# Altium PCB Boost_Conv_V1.0PCB.PcbDoc (part 2 of 3)
Units mm, origin at the board's own origin, x right, y up, seen from the top; angles counter-clockwise.
Board outline 213.5 x 150 mm, 2 copper layers (Top Layer, Bottom Layer); 53 components, 42 nets, 190 pads, 3434 vias.
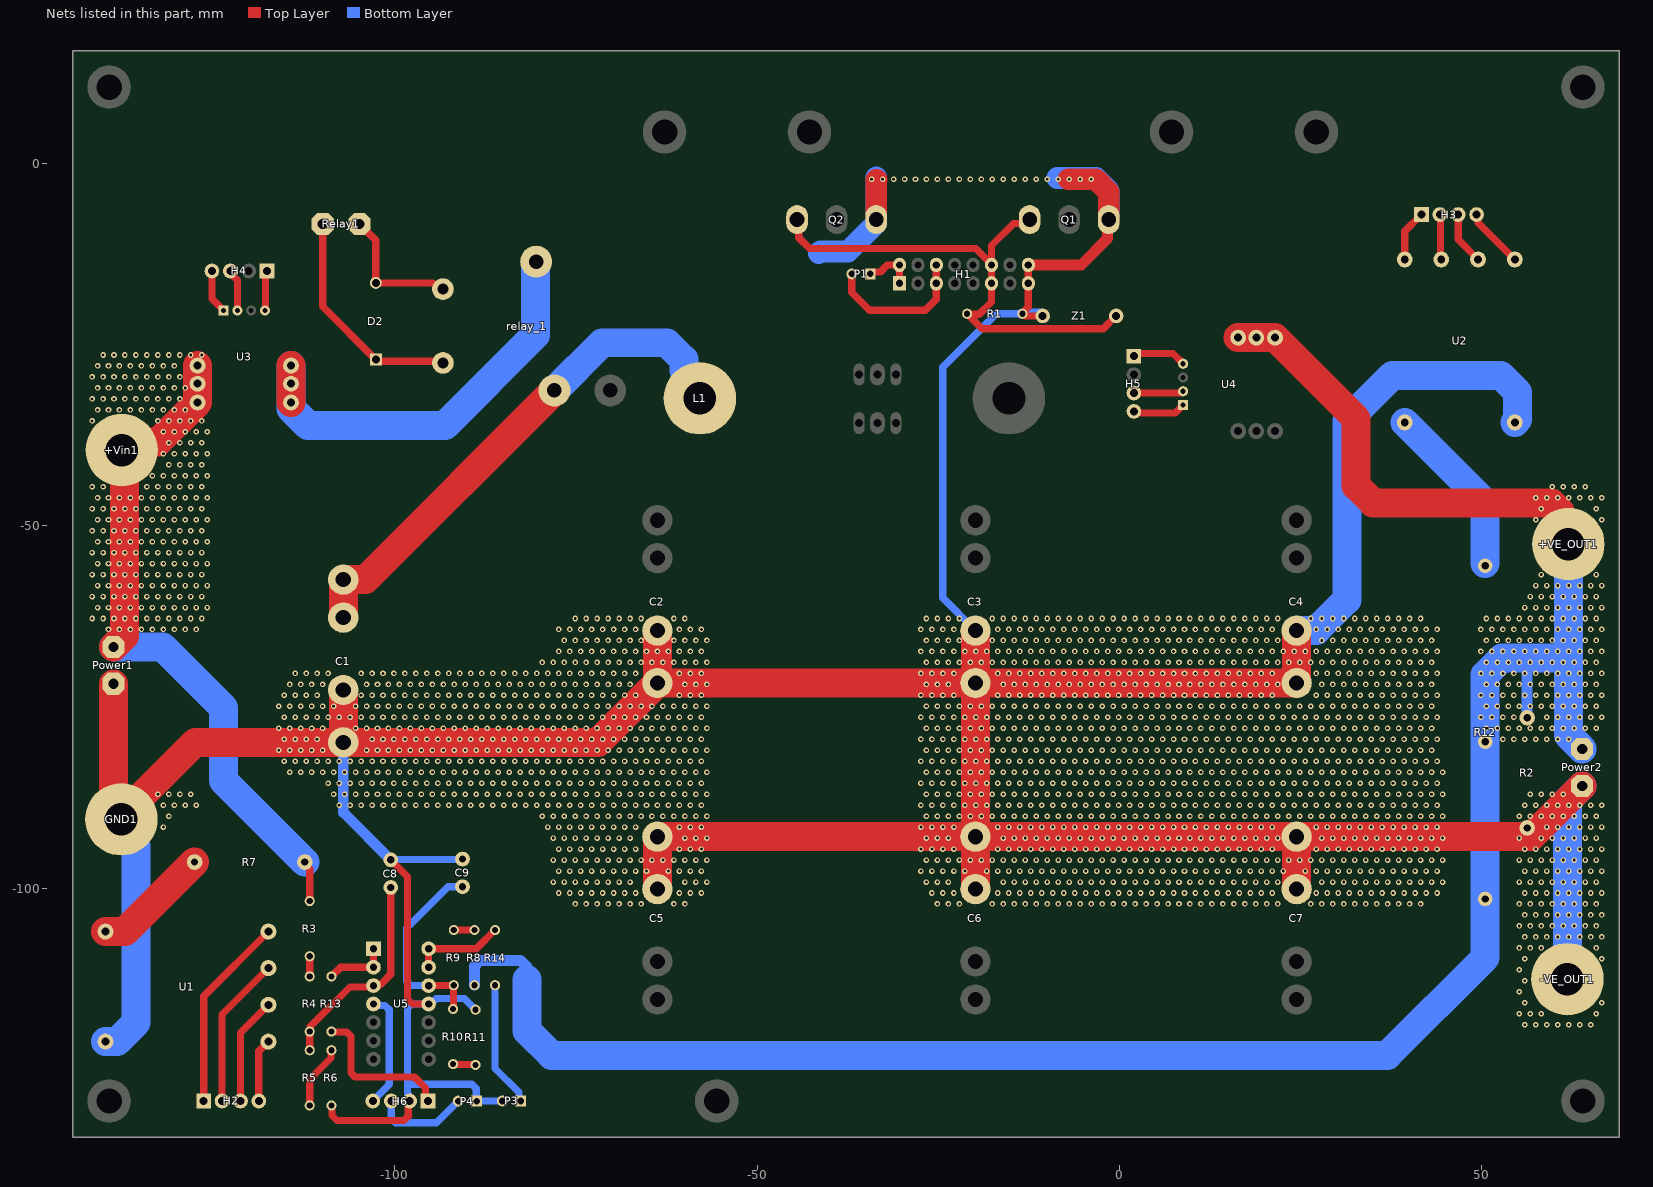
[diagram p2: the nets of this part, all layers, seen from the top]

## Via types
v1: diameter 0.762, hole 0.381, Top Layer to Bottom Layer, 3433 vias
v2: diameter 2, hole 1, Top Layer to Bottom Layer, 1 vias

## Nets (pads, with @x,y where several pads share a name; then routed paths per layer and width w, separated by ;. In a path a pad name is that pad's centre, name@x,y a point inside that pad or via, vN(x,y) a via of type N, cw(c..) or ccw(c..) an arc to the next point about the centre after c; other vN are vias at no path point) (continued)
Emitter: -VE_OUT1.1 C1.2 C2.2 C3.2 C4.2 C5.2 C6.2 C7.2 C8.2 C9.2 GND1.1 H1.8 H6.2 P3.2 P4.1 Power1.1 Power2.2 Q1.3 Q2.3 R1.1 R2.1 R6.1 R11.1 U1.- U2.- U5.11 Z1.A | length 750
  Top Layer w1: R6.1@-108.774,-130.013 -108.697,-130.09 -108.697,-131.418 -108.011,-132.103 -98.774,-132.103 -98.171,-131.501 -98.171,-129.601 H6.2@-97.974,-129.403 ; C8.2@-100.574,-96.103 -100.574,-96.122 -98.274,-98.422 -98.274,-115.318 -97.588,-116.003 U5.11@-95.354,-116.003 ; H1.8@-12.554,-13.963 H1.8@-12.554,-16.503 -12.554,-19.775 -13.374,-20.595 R1.1@-13.374,-20.703 -13.265,-20.703 -12.965,-21.003 Z1.A@-10.574,-21.003
  Top Layer w1.5: H1.8@-12.554,-13.963 -5.25,-13.963 -1.618,-10.331 -1.618,-7.868 Q1.3@-1.448,-7.698
  Top Layer w3: Q2.3@-33.553,-7.698 -33.553,-2.235 -33.528,-2.21 ; v1@-7.01,-2.135 -3.205,-2.135 -1.448,-3.893 Q1.3@-1.448,-7.698
  Top Layer w4: Power1.1@-138.886,-71.792 -138.886,-89.391 GND1.1@-137.774,-90.503 ; GND1.1@-137.774,-90.103 -127.558,-79.887 C1.2@-107.136,-79.887 ; C1.2@-107.136,-72.648 C1.2@-107.136,-79.887 ; C5.2@-63.766,-100.14 C5.2@-63.766,-92.901 C6.2@-19.849,-92.901 ; C2.2@-63.766,-64.444 C2.2@-63.766,-71.683 ; C6.2@-19.849,-100.14 C6.2@-19.849,-92.901 ; C3.2@-19.849,-64.444 C3.2@-19.849,-71.683 ; C7.2@24.499,-100.14 C7.2@24.499,-92.901 ; C4.2@24.499,-64.444 C4.2@24.499,-71.683 C3.2@-19.849,-71.683 ; Power2.2@63.926,-85.883 56.908,-92.901 C7.2@24.499,-92.901 ; C1.2@-107.136,-79.887 -71.97,-79.887 C2.2@-63.766,-71.683 ; C2.2@-63.766,-71.683 C3.2@-19.849,-71.683 ; C6.2@-19.849,-92.901 C7.2@24.499,-92.901 ; C6.2@-19.849,-92.901 C3.2@-19.849,-71.683
  Bottom Layer w1: C8.2@-100.574,-96.103 -100.519,-96.048 -90.729,-96.048 C9.2@-90.674,-95.993 ; H6.2@-97.974,-129.403 -98.171,-129.206 -98.171,-128.476 -98.274,-128.374 -98.274,-127.103 ; R11.1@-88.874,-116.793 -88.877,-116.793 -90.431,-115.239 -94.31,-115.239 -95.074,-116.003 U5.11@-95.354,-116.003 -97.688,-116.003 -98.274,-116.589 -98.274,-127.103 ; P3.2@-85.174,-129.4 -85.176,-129.402 -88.732,-129.402 P4.1@-88.734,-129.403 -88.774,-129.363 -88.774,-127.703 -89.374,-127.103 -98.274,-127.103 ; C3.2@-19.849,-64.444 -24.374,-59.92 -24.374,-28.103 -16.974,-20.703 R1.1@-13.374,-20.703 ; Z1.A@-10.874,-20.703 cw(c-10.874,-21.003) -10.853,-20.704 cw(c-10.874,-21.003) -10.574,-20.983 cw(c-10.874,-21.003) Z1.A@-10.574,-21.003 ; 62.527,-86.813 63.457,-85.883 Power2.2@63.926,-85.883
  Bottom Layer w1.5: C1.2@-107.136,-79.887 -107.136,-89.541 C8.2@-100.574,-96.103 ; R1.1@-13.374,-20.703 -10.874,-20.703 Z1.A@-10.854,-20.703 ; Z1.A@-10.853,-20.704 -10.574,-20.983 Z1.A@-10.387,-21.17
  Bottom Layer w3: -41.478,-12.319 -41.25,-12.09 -37.446,-12.09 -33.553,-8.198 Q2.3@-33.553,-7.698 -33.553,-1.849 ; v1@-8.56,-1.96 -3.205,-1.96 -1.448,-3.717 Q1.3@-1.448,-7.698
  Bottom Layer w4: U1.-@-139.974,-121.203 -138.374,-121.203 -135.731,-118.56 -135.731,-94.17 -137.774,-92.127 GND1.1@-137.774,-90.503 ; C4.2@24.499,-64.444 24.537,-64.406 27.224,-64.406 31.426,-60.203 31.426,-35.503 37.726,-29.203 52.683,-29.203 55.026,-31.547 55.026,-35.303 U2.-@54.626,-35.703 ; -VE_OUT1.1@61.885,-112.578 61.885,-87.924 Power2.2@63.926,-85.883
  other v1: 56.01,-118.871 57.526,-118.871 59.042,-118.871 60.558,-118.871 62.074,-118.871 63.59,-118.871 65.106,-118.871 55.252,-117.355 56.768,-117.355 58.284,-117.355 65.864,-117.355 56.01,-115.839 66.622,-115.839 55.252,-114.323 56.01,-112.807 55.252,-111.291 56.01,-109.775 66.622,-109.775 55.252,-108.259 56.768,-108.259 58.284,-108.259 65.864,-108.259 56.01,-106.743 57.526,-106.743 59.042,-106.743 60.558,-106.743 62.074,-106.743 63.59,-106.743 65.106,-106.743 66.622,-106.743 55.252,-105.227 56.768,-105.227 58.284,-105.227 59.8,-105.227 61.316,-105.227 62.832,-105.227 64.348,-105.227 65.864,-105.227 56.01,-103.711 57.526,-103.711 59.042,-103.711 60.558,-103.711 62.074,-103.711 63.59,-103.711 65.106,-103.711 66.622,-103.711 -75.124,-102.195 -73.608,-102.195 -72.092,-102.195 -70.576,-102.195 -69.06,-102.195 -67.544,-102.195 -66.028,-102.195 -61.48,-102.195 -59.964,-102.195 -25.096,-102.195 -23.58,-102.195 -22.064,-102.195 -17.516,-102.195 -16,-102.195 -14.484,-102.195 -12.968,-102.195 -11.452,-102.195 -9.936,-102.195 -8.42,-102.195 -6.904,-102.195 -5.388,-102.195 -3.872,-102.195 -2.356,-102.195 -0.84,-102.195 0.676,-102.195 2.192,-102.195 3.708,-102.195 5.224,-102.195 6.74,-102.195 8.256,-102.195 9.772,-102.195 11.288,-102.195 12.804,-102.195 14.32,-102.195 15.836,-102.195 17.352,-102.195 18.868,-102.195 20.384,-102.195 21.9,-102.195 26.448,-102.195 27.964,-102.195 29.48,-102.195 30.996,-102.195 32.512,-102.195 34.028,-102.195 35.544,-102.195 37.06,-102.195 38.576,-102.195 40.092,-102.195 41.608,-102.195 55.252,-102.195 56.768,-102.195 58.284,-102.195 59.8,-102.195 61.316,-102.195 62.832,-102.195 64.348,-102.195 65.864,-102.195 -77.398,-100.679 -75.882,-100.679 -74.366,-100.679 -72.85,-100.679 -71.334,-100.679 -69.818,-100.679 -68.302,-100.679 -66.786,-100.679 -60.722,-100.679 -59.206,-100.679 -57.69,-100.679 -25.854,-100.679 -24.338,-100.679 -22.822,-100.679 -16.758,-100.679 -15.242,-100.679 -13.726,-100.679 -12.21,-100.679 -10.694,-100.679 -9.178,-100.679 -7.662,-100.679 -6.146,-100.679 -4.63,-100.679 -3.114,-100.679 -1.598,-100.679 -0.082,-100.679 1.434,-100.679 2.95,-100.679 4.466,-100.679 5.982,-100.679 7.498,-100.679 9.014,-100.679 10.53,-100.679 12.046,-100.679 13.562,-100.679 15.078,-100.679 16.594,-100.679 18.11,-100.679 19.626,-100.679 21.142,-100.679 27.206,-100.679 28.722,-100.679 30.238,-100.679 31.754,-100.679 33.27,-100.679 34.786,-100.679 36.302,-100.679 37.818,-100.679 39.334,-100.679 40.85,-100.679 42.366,-100.679 43.882,-100.679 56.01,-100.679 57.526,-100.679 59.042,-100.679 60.558,-100.679 62.074,-100.679 63.59,-100.679 65.106,-100.679 66.622,-100.679 -78.156,-99.163 -76.64,-99.163 -75.124,-99.163 -73.608,-99.163 -72.092,-99.163 -70.576,-99.163 -69.06,-99.163 -67.544,-99.163 -59.964,-99.163 -58.448,-99.163 -56.932,-99.163 -26.612,-99.163 -25.096,-99.163 -23.58,-99.163 -16,-99.163 -14.484,-99.163 -12.968,-99.163 -11.452,-99.163 -9.936,-99.163 -8.42,-99.163 -6.904,-99.163 -5.388,-99.163 -3.872,-99.163 -2.356,-99.163 -0.84,-99.163 0.676,-99.163 2.192,-99.163 3.708,-99.163 5.224,-99.163 6.74,-99.163 8.256,-99.163 9.772,-99.163 11.288,-99.163 12.804,-99.163 14.32,-99.163 15.836,-99.163 17.352,-99.163 18.868,-99.163 20.384,-99.163 21.9,-99.163 27.964,-99.163 29.48,-99.163 30.996,-99.163 32.512,-99.163 34.028,-99.163 35.544,-99.163 37.06,-99.163 38.576,-99.163 40.092,-99.163 41.608,-99.163 43.124,-99.163 44.64,-99.163 55.252,-99.163 56.768,-99.163 58.284,-99.163 59.8,-99.163 61.316,-99.163 62.832,-99.163 64.348,-99.163 65.864,-99.163 -77.398,-97.647 -75.882,-97.647 -74.366,-97.647 -72.85,-97.647 -71.334,-97.647 -69.818,-97.647 -68.302,-97.647 -66.786,-97.647 -65.27,-97.647 -62.238,-97.647 -60.722,-97.647 -59.206,-97.647 -57.69,-97.647 -27.37,-97.647 -25.854,-97.647 -24.338,-97.647 -22.822,-97.647 -21.306,-97.647 -18.274,-97.647 -16.758,-97.647 -15.242,-97.647 -13.726,-97.647 -12.21,-97.647 -10.694,-97.647 -9.178,-97.647 -7.662,-97.647 -6.146,-97.647 -4.63,-97.647 -3.114,-97.647 -1.598,-97.647 -0.082,-97.647 1.434,-97.647 2.95,-97.647 4.466,-97.647 5.982,-97.647 7.498,-97.647 9.014,-97.647 10.53,-97.647 12.046,-97.647 13.562,-97.647 15.078,-97.647 16.594,-97.647 18.11,-97.647 19.626,-97.647 21.142,-97.647 22.658,-97.647 25.69,-97.647 27.206,-97.647 28.722,-97.647 30.238,-97.647 31.754,-97.647 33.27,-97.647 34.786,-97.647 36.302,-97.647 37.818,-97.647 39.334,-97.647 40.85,-97.647 42.366,-97.647 43.882,-97.647 56.01,-97.647 57.526,-97.647 59.042,-97.647 60.558,-97.647 62.074,-97.647 63.59,-97.647 65.106,-97.647 66.622,-97.647 -78.156,-96.131 -76.64,-96.131 -75.124,-96.131 -73.608,-96.131 -72.092,-96.131 -70.576,-96.131 -69.06,-96.131 -67.544,-96.131 -66.028,-96.131 -64.512,-96.131 -62.996,-96.131 -61.48,-96.131 -59.964,-96.131 -58.448,-96.131 -56.932,-96.131 -26.612,-96.131 -25.096,-96.131 -23.58,-96.131 -22.064,-96.131 -20.548,-96.131 -19.032,-96.131 -17.516,-96.131 -16,-96.131 -14.484,-96.131 -12.968,-96.131 -11.452,-96.131 -9.936,-96.131 -8.42,-96.131 -6.904,-96.131 -5.388,-96.131 -3.872,-96.131 -2.356,-96.131 -0.84,-96.131 0.676,-96.131 2.192,-96.131 3.708,-96.131 5.224,-96.131 6.74,-96.131 8.256,-96.131 9.772,-96.131 11.288,-96.131 12.804,-96.131 14.32,-96.131 15.836,-96.131 17.352,-96.131 18.868,-96.131 20.384,-96.131 21.9,-96.131 23.416,-96.131 24.932,-96.131 26.448,-96.131 27.964,-96.131 29.48,-96.131 30.996,-96.131 32.512,-96.131 34.028,-96.131 35.544,-96.131 37.06,-96.131 38.576,-96.131 40.092,-96.131 41.608,-96.131 43.124,-96.131 44.64,-96.131 55.252,-96.131 56.768,-96.131 58.284,-96.131 59.8,-96.131 61.316,-96.131 62.832,-96.131 64.348,-96.131 65.864,-96.131 -77.398,-94.615 -75.882,-94.615 -74.366,-94.615 -72.85,-94.615 -71.334,-94.615 -69.818,-94.615 -68.302,-94.615 -66.786,-94.615 -60.722,-94.615 -59.206,-94.615 -57.69,-94.615 -27.37,-94.615 -25.854,-94.615 -24.338,-94.615 -22.822,-94.615 -16.758,-94.615 -15.242,-94.615 -13.726,-94.615 -12.21,-94.615 -10.694,-94.615 -9.178,-94.615 -7.662,-94.615 -6.146,-94.615 -4.63,-94.615 -3.114,-94.615 -1.598,-94.615 -0.082,-94.615 1.434,-94.615 2.95,-94.615 4.466,-94.615 5.982,-94.615 7.498,-94.615 9.014,-94.615 10.53,-94.615 12.046,-94.615 13.562,-94.615 15.078,-94.615 16.594,-94.615 18.11,-94.615 19.626,-94.615 21.142,-94.615 27.206,-94.615 28.722,-94.615 30.238,-94.615 31.754,-94.615 33.27,-94.615 34.786,-94.615 36.302,-94.615 37.818,-94.615 39.334,-94.615 40.85,-94.615 42.366,-94.615 43.882,-94.615 56.01,-94.615 57.526,-94.615 59.042,-94.615 60.558,-94.615 62.074,-94.615 63.59,-94.615 65.106,-94.615 66.622,-94.615 -78.156,-93.099 -76.64,-93.099 -75.124,-93.099 -73.608,-93.099 -72.092,-93.099 -70.576,-93.099 -69.06,-93.099 -67.544,-93.099 -59.964,-93.099 -58.448,-93.099 -56.932,-93.099 -26.612,-93.099 -25.096,-93.099 -23.58,-93.099 -16,-93.099 -14.484,-93.099 -12.968,-93.099 -11.452,-93.099 -9.936,-93.099 -8.42,-93.099 -6.904,-93.099 -5.388,-93.099 -3.872,-93.099 -2.356,-93.099 -0.84,-93.099 0.676,-93.099 2.192,-93.099 3.708,-93.099 5.224,-93.099 6.74,-93.099 8.256,-93.099 9.772,-93.099 11.288,-93.099 12.804,-93.099 14.32,-93.099 15.836,-93.099 17.352,-93.099 18.868,-93.099 20.384,-93.099 21.9,-93.099 27.964,-93.099 29.48,-93.099 30.996,-93.099 32.512,-93.099 34.028,-93.099 35.544,-93.099 37.06,-93.099 38.576,-93.099 40.092,-93.099 41.608,-93.099 43.124,-93.099 44.64,-93.099 55.252,-93.099 58.284,-93.099 59.8,-93.099 61.316,-93.099 62.832,-93.099 64.348,-93.099 65.864,-93.099 -131.974,-91.583 -78.914,-91.583 -77.398,-91.583 -75.882,-91.583 -74.366,-91.583 -72.85,-91.583 -71.334,-91.583 -69.818,-91.583 -68.302,-91.583 -66.786,-91.583 -60.722,-91.583 -59.206,-91.583 -57.69,-91.583 -27.37,-91.583 -25.854,-91.583 -24.338,-91.583 -22.822,-91.583 -16.758,-91.583 -15.242,-91.583 -13.726,-91.583 -12.21,-91.583 -10.694,-91.583 -9.178,-91.583 -7.662,-91.583 -6.146,-91.583 -4.63,-91.583 -3.114,-91.583 -1.598,-91.583 -0.082,-91.583 1.434,-91.583 2.95,-91.583 4.466,-91.583 5.982,-91.583 7.498,-91.583 9.014,-91.583 10.53,-91.583 12.046,-91.583 13.562,-91.583 15.078,-91.583 16.594,-91.583 18.11,-91.583 19.626,-91.583 21.142,-91.583 27.206,-91.583 28.722,-91.583 30.238,-91.583 31.754,-91.583 33.27,-91.583 34.786,-91.583 36.302,-91.583 37.818,-91.583 39.334,-91.583 40.85,-91.583 42.366,-91.583 43.882,-91.583 59.042,-91.583 60.558,-91.583 62.074,-91.583 63.59,-91.583 65.106,-91.583 66.622,-91.583 -131.216,-90.067 -79.672,-90.067 -78.156,-90.067 -76.64,-90.067 -75.124,-90.067 -73.608,-90.067 -72.092,-90.067 -70.576,-90.067 -69.06,-90.067 -67.544,-90.067 -66.028,-90.067 -64.512,-90.067 -62.996,-90.067 -61.48,-90.067 -59.964,-90.067 -58.448,-90.067 -56.932,-90.067 -26.612,-90.067 -25.096,-90.067 -23.58,-90.067 -22.064,-90.067 -20.548,-90.067 -19.032,-90.067 -17.516,-90.067 -16,-90.067 -14.484,-90.067 -12.968,-90.067 -11.452,-90.067 -9.936,-90.067 -8.42,-90.067 -6.904,-90.067 -5.388,-90.067 -3.872,-90.067 -2.356,-90.067 -0.84,-90.067 0.676,-90.067 2.192,-90.067 3.708,-90.067 5.224,-90.067 6.74,-90.067 8.256,-90.067 9.772,-90.067 11.288,-90.067 12.804,-90.067 14.32,-90.067 15.836,-90.067 17.352,-90.067 18.868,-90.067 20.384,-90.067 21.9,-90.067 23.416,-90.067 24.932,-90.067 26.448,-90.067 27.964,-90.067 29.48,-90.067 30.996,-90.067 32.512,-90.067 34.028,-90.067 35.544,-90.067 37.06,-90.067 38.576,-90.067 40.092,-90.067 41.608,-90.067 43.124,-90.067 44.64,-90.067 55.252,-90.067 56.768,-90.067 58.284,-90.067 59.8,-90.067 61.316,-90.067 62.832,-90.067 64.348,-90.067 65.864,-90.067 -131.974,-88.551 -130.458,-88.551 -128.942,-88.551 -127.426,-88.551 -107.718,-88.551 -106.202,-88.551 -104.686,-88.551 -103.17,-88.551 -101.654,-88.551 -100.138,-88.551 -98.622,-88.551 -97.106,-88.551 -95.59,-88.551 -94.074,-88.551 -92.558,-88.551 -91.042,-88.551 -89.526,-88.551 -88.01,-88.551 -86.494,-88.551 -84.978,-88.551 -83.462,-88.551 -81.946,-88.551 -80.43,-88.551 -78.914,-88.551 -77.398,-88.551 -75.882,-88.551 -74.366,-88.551 -72.85,-88.551 -71.334,-88.551 -69.818,-88.551 -68.302,-88.551 -66.786,-88.551 -65.27,-88.551 -63.754,-88.551 -62.238,-88.551 -60.722,-88.551 -59.206,-88.551 -57.69,-88.551 -27.37,-88.551 -25.854,-88.551 -24.338,-88.551 -22.822,-88.551 -21.306,-88.551 -19.79,-88.551 -18.274,-88.551 -16.758,-88.551 -15.242,-88.551 -13.726,-88.551 -12.21,-88.551 -10.694,-88.551 -9.178,-88.551 -7.662,-88.551 -6.146,-88.551 -4.63,-88.551 -3.114,-88.551 -1.598,-88.551 -0.082,-88.551 1.434,-88.551 2.95,-88.551 4.466,-88.551 5.982,-88.551 7.498,-88.551 9.014,-88.551 10.53,-88.551 12.046,-88.551 13.562,-88.551 15.078,-88.551 16.594,-88.551 18.11,-88.551 19.626,-88.551 21.142,-88.551 22.658,-88.551 24.174,-88.551 25.69,-88.551 27.206,-88.551 28.722,-88.551 30.238,-88.551 31.754,-88.551 33.27,-88.551 34.786,-88.551 36.302,-88.551 37.818,-88.551 39.334,-88.551 40.85,-88.551 42.366,-88.551 43.882,-88.551 56.01,-88.551 57.526,-88.551 59.042,-88.551 60.558,-88.551 62.074,-88.551 63.59,-88.551 65.106,-88.551 66.622,-88.551 -132.732,-87.035 -131.216,-87.035 -129.7,-87.035 -128.184,-87.035 -108.476,-87.035 -106.96,-87.035 -105.444,-87.035 -103.928,-87.035 -102.412,-87.035 -100.896,-87.035 -99.38,-87.035 -97.864,-87.035 -96.348,-87.035 -94.832,-87.035 -93.316,-87.035 -91.8,-87.035 -90.284,-87.035 -88.768,-87.035 -87.252,-87.035 -85.736,-87.035 -84.22,-87.035 -82.704,-87.035 -81.188,-87.035 -79.672,-87.035 -78.156,-87.035 -76.64,-87.035 -75.124,-87.035 -73.608,-87.035 -72.092,-87.035 -70.576,-87.035 -69.06,-87.035 -67.544,-87.035 -66.028,-87.035 -64.512,-87.035 -62.996,-87.035 -61.48,-87.035 -59.964,-87.035 -58.448,-87.035 -56.932,-87.035 -26.612,-87.035 -25.096,-87.035 -23.58,-87.035 -22.064,-87.035 -20.548,-87.035 -19.032,-87.035 -17.516,-87.035 -16,-87.035 -14.484,-87.035 -12.968,-87.035 -11.452,-87.035 -9.936,-87.035 -8.42,-87.035 -6.904,-87.035 -5.388,-87.035 -3.872,-87.035 -2.356,-87.035 -0.84,-87.035 0.676,-87.035 2.192,-87.035 3.708,-87.035 5.224,-87.035 6.74,-87.035 8.256,-87.035 9.772,-87.035 11.288,-87.035 12.804,-87.035 14.32,-87.035 15.836,-87.035 17.352,-87.035 18.868,-87.035 20.384,-87.035 21.9,-87.035 23.416,-87.035 24.932,-87.035 26.448,-87.035 27.964,-87.035 29.48,-87.035 30.996,-87.035 32.512,-87.035 34.028,-87.035 35.544,-87.035 37.06,-87.035 38.576,-87.035 40.092,-87.035 41.608,-87.035 43.124,-87.035 44.64,-87.035 56.768,-87.035 58.284,-87.035 59.8,-87.035 61.316,-87.035 -109.234,-85.519 -107.718,-85.519 -106.202,-85.519 -104.686,-85.519 -103.17,-85.519 -101.654,-85.519 -100.138,-85.519 -98.622,-85.519 -97.106,-85.519 -95.59,-85.519 -94.074,-85.519 -92.558,-85.519 -91.042,-85.519 -89.526,-85.519 -88.01,-85.519 -86.494,-85.519 -84.978,-85.519 -83.462,-85.519 -81.946,-85.519 -80.43,-85.519 -78.914,-85.519 -77.398,-85.519 -75.882,-85.519 -74.366,-85.519 -72.85,-85.519 -71.334,-85.519 -69.818,-85.519 -68.302,-85.519 -66.786,-85.519 -65.27,-85.519 -63.754,-85.519 -62.238,-85.519 -60.722,-85.519 -59.206,-85.519 -57.69,-85.519 -27.37,-85.519 -25.854,-85.519 -24.338,-85.519 -22.822,-85.519 -21.306,-85.519 -19.79,-85.519 -18.274,-85.519 -16.758,-85.519 -15.242,-85.519 -13.726,-85.519 -12.21,-85.519 -10.694,-85.519 -9.178,-85.519 -7.662,-85.519 -6.146,-85.519 -4.63,-85.519 -3.114,-85.519 -1.598,-85.519 -0.082,-85.519 1.434,-85.519 2.95,-85.519 4.466,-85.519 5.982,-85.519 7.498,-85.519 9.014,-85.519 10.53,-85.519 12.046,-85.519 13.562,-85.519 15.078,-85.519 16.594,-85.519 18.11,-85.519 19.626,-85.519 21.142,-85.519 22.658,-85.519 24.174,-85.519 25.69,-85.519 27.206,-85.519 28.722,-85.519 30.238,-85.519 31.754,-85.519 33.27,-85.519 34.786,-85.519 36.302,-85.519 37.818,-85.519 39.334,-85.519 40.85,-85.519 42.366,-85.519 43.882,-85.519 -114.54,-84.003 -113.024,-84.003 -111.508,-84.003 -109.992,-84.003 -108.476,-84.003 -106.96,-84.003 -105.444,-84.003 -103.928,-84.003 -102.412,-84.003 -100.896,-84.003 -99.38,-84.003 -97.864,-84.003 -96.348,-84.003 -94.832,-84.003 -93.316,-84.003 -91.8,-84.003 -90.284,-84.003 -88.768,-84.003 -87.252,-84.003 -85.736,-84.003 -84.22,-84.003 -82.704,-84.003 -81.188,-84.003 -79.672,-84.003 -78.156,-84.003 -76.64,-84.003 -75.124,-84.003 -73.608,-84.003 -72.092,-84.003 -70.576,-84.003 -69.06,-84.003 -67.544,-84.003 -66.028,-84.003 -64.512,-84.003 -62.996,-84.003 -61.48,-84.003 -59.964,-84.003 -58.448,-84.003 -56.932,-84.003 -26.612,-84.003 -25.096,-84.003 -23.58,-84.003 -22.064,-84.003 -20.548,-84.003 -19.032,-84.003 -17.516,-84.003 -16,-84.003 -14.484,-84.003 -12.968,-84.003 -11.452,-84.003 -9.936,-84.003 -8.42,-84.003 -6.904,-84.003 -5.388,-84.003 -3.872,-84.003 -2.356,-84.003 -0.84,-84.003 0.676,-84.003 2.192,-84.003 3.708,-84.003 5.224,-84.003 6.74,-84.003 8.256,-84.003 9.772,-84.003 11.288,-84.003 12.804,-84.003 14.32,-84.003 15.836,-84.003 17.352,-84.003 18.868,-84.003 20.384,-84.003 21.9,-84.003 23.416,-84.003 24.932,-84.003 26.448,-84.003 27.964,-84.003 29.48,-84.003 30.996,-84.003 32.512,-84.003 34.028,-84.003 35.544,-84.003 37.06,-84.003 38.576,-84.003 40.092,-84.003 41.608,-84.003 43.124,-84.003 44.64,-84.003 -115.298,-82.487 -113.782,-82.487 -112.266,-82.487 -110.75,-82.487 -109.234,-82.487 -107.718,-82.487 -106.202,-82.487 -104.686,-82.487 -103.17,-82.487 -101.654,-82.487 -100.138,-82.487 -98.622,-82.487 -97.106,-82.487 -95.59,-82.487 -94.074,-82.487 -92.558,-82.487 -91.042,-82.487 -89.526,-82.487 -88.01,-82.487 -86.494,-82.487 -84.978,-82.487 -83.462,-82.487 -81.946,-82.487 -80.43,-82.487 -78.914,-82.487 -77.398,-82.487 -75.882,-82.487 -74.366,-82.487 -72.85,-82.487 -71.334,-82.487 -69.818,-82.487 -68.302,-82.487 -66.786,-82.487 -65.27,-82.487 -63.754,-82.487 -62.238,-82.487 -60.722,-82.487 -59.206,-82.487 -57.69,-82.487 -27.37,-82.487 -25.854,-82.487 -24.338,-82.487 -22.822,-82.487 -21.306,-82.487 -19.79,-82.487 -18.274,-82.487 -16.758,-82.487 -15.242,-82.487 -13.726,-82.487 -12.21,-82.487 -10.694,-82.487 -9.178,-82.487 -7.662,-82.487 -6.146,-82.487 -4.63,-82.487 -3.114,-82.487 -1.598,-82.487 -0.082,-82.487 1.434,-82.487 2.95,-82.487 4.466,-82.487 5.982,-82.487 7.498,-82.487 9.014,-82.487 10.53,-82.487 12.046,-82.487 13.562,-82.487 15.078,-82.487 16.594,-82.487 18.11,-82.487 19.626,-82.487 21.142,-82.487 22.658,-82.487 24.174,-82.487 25.69,-82.487 27.206,-82.487 28.722,-82.487 30.238,-82.487 31.754,-82.487 33.27,-82.487 34.786,-82.487 36.302,-82.487 37.818,-82.487 39.334,-82.487 40.85,-82.487 42.366,-82.487 43.882,-82.487 -116.056,-80.971 -114.54,-80.971 -113.024,-80.971 -111.508,-80.971 -109.992,-80.971 -103.928,-80.971 -102.412,-80.971 -100.896,-80.971 -99.38,-80.971 -97.864,-80.971 -96.348,-80.971 -94.832,-80.971 -93.316,-80.971 -91.8,-80.971 -90.284,-80.971 -88.768,-80.971 -87.252,-80.971 -85.736,-80.971 -84.22,-80.971 -82.704,-80.971 -81.188,-80.971 -79.672,-80.971 -78.156,-80.971 -76.64,-80.971 -75.124,-80.971 -73.608,-80.971 -72.092,-80.971 -70.576,-80.971 -69.06,-80.971 -67.544,-80.971 -66.028,-80.971 -64.512,-80.971 -62.996,-80.971 -61.48,-80.971 -59.964,-80.971 -58.448,-80.971 -56.932,-80.971 -26.612,-80.971 -25.096,-80.971 -23.58,-80.971 -22.064,-80.971 -20.548,-80.971 -19.032,-80.971 -17.516,-80.971 -16,-80.971 -14.484,-80.971 -12.968,-80.971 -11.452,-80.971 -9.936,-80.971 -8.42,-80.971 -6.904,-80.971 -5.388,-80.971 -3.872,-80.971 -2.356,-80.971 -0.84,-80.971 0.676,-80.971 2.192,-80.971 3.708,-80.971 5.224,-80.971 6.74,-80.971 8.256,-80.971 9.772,-80.971 11.288,-80.971 12.804,-80.971 14.32,-80.971 15.836,-80.971 17.352,-80.971 18.868,-80.971 20.384,-80.971 21.9,-80.971 23.416,-80.971 24.932,-80.971 26.448,-80.971 27.964,-80.971 29.48,-80.971 30.996,-80.971 32.512,-80.971 34.028,-80.971 35.544,-80.971 37.06,-80.971 38.576,-80.971 40.092,-80.971 41.608,-80.971 43.124,-80.971 -115.298,-79.455 -113.782,-79.455 -112.266,-79.455 -110.75,-79.455 -103.17,-79.455 -101.654,-79.455 -100.138,-79.455 -98.622,-79.455 -97.106,-79.455 -95.59,-79.455 -94.074,-79.455 -92.558,-79.455 -91.042,-79.455 -89.526,-79.455 -88.01,-79.455 -86.494,-79.455 -84.978,-79.455 -83.462,-79.455 -81.946,-79.455 -80.43,-79.455 -78.914,-79.455 -77.398,-79.455 -75.882,-79.455 -74.366,-79.455 -72.85,-79.455 -71.334,-79.455 -69.818,-79.455 -68.302,-79.455 -66.786,-79.455 -65.27,-79.455 -63.754,-79.455 -62.238,-79.455 -60.722,-79.455 -59.206,-79.455 -57.69,-79.455 -27.37,-79.455 -25.854,-79.455 -24.338,-79.455 -22.822,-79.455 -21.306,-79.455 -19.79,-79.455 -18.274,-79.455 -16.758,-79.455 -15.242,-79.455 -13.726,-79.455 -12.21,-79.455 -10.694,-79.455 -9.178,-79.455 -7.662,-79.455 -6.146,-79.455 -4.63,-79.455 -3.114,-79.455 -1.598,-79.455 -0.082,-79.455 1.434,-79.455 2.95,-79.455 4.466,-79.455 5.982,-79.455 7.498,-79.455 9.014,-79.455 10.53,-79.455 12.046,-79.455 13.562,-79.455 15.078,-79.455 16.594,-79.455 18.11,-79.455 19.626,-79.455 21.142,-79.455 22.658,-79.455 24.174,-79.455 25.69,-79.455 27.206,-79.455 28.722,-79.455 30.238,-79.455 31.754,-79.455 33.27,-79.455 34.786,-79.455 36.302,-79.455 37.818,-79.455 39.334,-79.455 40.85,-79.455 42.366,-79.455 43.882,-79.455 -116.056,-77.939 -114.54,-77.939 -113.024,-77.939 -111.508,-77.939 -109.992,-77.939 -105.444,-77.939 -103.928,-77.939 -102.412,-77.939 -100.896,-77.939 -99.38,-77.939 -97.864,-77.939 -96.348,-77.939 -94.832,-77.939 -93.316,-77.939 -91.8,-77.939 -90.284,-77.939 -88.768,-77.939 -87.252,-77.939 -85.736,-77.939 -84.22,-77.939 -82.704,-77.939 -81.188,-77.939 -79.672,-77.939 -78.156,-77.939 -76.64,-77.939 -75.124,-77.939 -73.608,-77.939 -72.092,-77.939 -70.576,-77.939 -69.06,-77.939 -67.544,-77.939 -66.028,-77.939 -64.512,-77.939 -62.996,-77.939 -61.48,-77.939 -59.964,-77.939 -58.448,-77.939 -56.932,-77.939 -26.612,-77.939 -25.096,-77.939 -23.58,-77.939 -22.064,-77.939 -20.548,-77.939 -19.032,-77.939 -17.516,-77.939 -16,-77.939 -14.484,-77.939 -12.968,-77.939 -11.452,-77.939 -9.936,-77.939 -8.42,-77.939 -6.904,-77.939 -5.388,-77.939 -3.872,-77.939 -2.356,-77.939 -0.84,-77.939 0.676,-77.939 2.192,-77.939 3.708,-77.939 5.224,-77.939 6.74,-77.939 8.256,-77.939 9.772,-77.939 11.288,-77.939 12.804,-77.939 14.32,-77.939 15.836,-77.939 17.352,-77.939 18.868,-77.939 20.384,-77.939 21.9,-77.939 23.416,-77.939 24.932,-77.939 26.448,-77.939 27.964,-77.939 29.48,-77.939 30.996,-77.939 32.512,-77.939 34.028,-77.939 35.544,-77.939 37.06,-77.939 38.576,-77.939 40.092,-77.939 41.608,-77.939 43.124,-77.939 -115.298,-76.423 -113.782,-76.423 -112.266,-76.423 -110.75,-76.423 -109.234,-76.423 -107.718,-76.423 -106.202,-76.423 -104.686,-76.423 -103.17,-76.423 -101.654,-76.423 -100.138,-76.423 -98.622,-76.423 -97.106,-76.423 -95.59,-76.423 -94.074,-76.423 -92.558,-76.423 -91.042,-76.423 -89.526,-76.423 -88.01,-76.423 -86.494,-76.423 -84.978,-76.423 -83.462,-76.423 -81.946,-76.423 -80.43,-76.423 -78.914,-76.423 -77.398,-76.423 -75.882,-76.423 -74.366,-76.423 -72.85,-76.423 -71.334,-76.423 -69.818,-76.423 -68.302,-76.423 -66.786,-76.423 -65.27,-76.423 -63.754,-76.423 -62.238,-76.423 -60.722,-76.423 -59.206,-76.423 -57.69,-76.423 -27.37,-76.423 -25.854,-76.423 -24.338,-76.423 -22.822,-76.423 -21.306,-76.423 -19.79,-76.423 -18.274,-76.423 -16.758,-76.423 -15.242,-76.423 -13.726,-76.423 -12.21,-76.423 -10.694,-76.423 -9.178,-76.423 -7.662,-76.423 -6.146,-76.423 -4.63,-76.423 -3.114,-76.423 -1.598,-76.423 -0.082,-76.423 1.434,-76.423 2.95,-76.423 4.466,-76.423 5.982,-76.423 7.498,-76.423 9.014,-76.423 10.53,-76.423 12.046,-76.423 13.562,-76.423 15.078,-76.423 16.594,-76.423 18.11,-76.423 19.626,-76.423 21.142,-76.423 22.658,-76.423 24.174,-76.423 25.69,-76.423 27.206,-76.423 28.722,-76.423 30.238,-76.423 31.754,-76.423 33.27,-76.423 34.786,-76.423 36.302,-76.423 37.818,-76.423 39.334,-76.423 40.85,-76.423 42.366,-76.423 43.882,-76.423 -116.056,-74.907 -114.54,-74.907 -113.024,-74.907 -111.508,-74.907 -109.992,-74.907 -108.476,-74.907 -105.444,-74.907 -103.928,-74.907 -102.412,-74.907 -100.896,-74.907 -99.38,-74.907 -97.864,-74.907 -96.348,-74.907 -94.832,-74.907 -93.316,-74.907 -91.8,-74.907 -90.284,-74.907 -88.768,-74.907 -87.252,-74.907 -85.736,-74.907 -84.22,-74.907 -82.704,-74.907 -81.188,-74.907 -79.672,-74.907 -78.156,-74.907 -76.64,-74.907 -75.124,-74.907 -73.608,-74.907 -72.092,-74.907 -70.576,-74.907 -69.06,-74.907 -67.544,-74.907 -66.028,-74.907 -64.512,-74.907 -62.996,-74.907 -61.48,-74.907 -59.964,-74.907 -58.448,-74.907 -56.932,-74.907 -26.612,-74.907 -25.096,-74.907 -23.58,-74.907 -22.064,-74.907 -20.548,-74.907 -19.032,-74.907 -17.516,-74.907 -16,-74.907 -14.484,-74.907 -12.968,-74.907 -11.452,-74.907 -9.936,-74.907 -8.42,-74.907 -6.904,-74.907 -5.388,-74.907 -3.872,-74.907 -2.356,-74.907 -0.84,-74.907 0.676,-74.907 2.192,-74.907 3.708,-74.907 5.224,-74.907 6.74,-74.907 8.256,-74.907 9.772,-74.907 11.288,-74.907 12.804,-74.907 14.32,-74.907 15.836,-74.907 17.352,-74.907 18.868,-74.907 20.384,-74.907 21.9,-74.907 23.416,-74.907 24.932,-74.907 26.448,-74.907 27.964,-74.907 29.48,-74.907 30.996,-74.907 32.512,-74.907 34.028,-74.907 35.544,-74.907 37.06,-74.907 38.576,-74.907 40.092,-74.907 41.608,-74.907 43.124,-74.907 -115.298,-73.391 -113.782,-73.391 -112.266,-73.391 -110.75,-73.391 -104.686,-73.391 -103.17,-73.391 -101.654,-73.391 -100.138,-73.391 -98.622,-73.391 -97.106,-73.391 -95.59,-73.391 -94.074,-73.391 -92.558,-73.391 -91.042,-73.391 -89.526,-73.391 -88.01,-73.391 -86.494,-73.391 -84.978,-73.391 -83.462,-73.391 -81.946,-73.391 -80.43,-73.391 -78.914,-73.391 -77.398,-73.391 -75.882,-73.391 -74.366,-73.391 -72.85,-73.391 -71.334,-73.391 -69.818,-73.391 -68.302,-73.391 -66.786,-73.391 -60.722,-73.391 -59.206,-73.391 -57.69,-73.391 -27.37,-73.391 -25.854,-73.391 -24.338,-73.391 -22.822,-73.391 -16.758,-73.391 -15.242,-73.391 -13.726,-73.391 -12.21,-73.391 -10.694,-73.391 -9.178,-73.391 -7.662,-73.391 -6.146,-73.391 -4.63,-73.391 -3.114,-73.391 -1.598,-73.391 -0.082,-73.391 1.434,-73.391 2.95,-73.391 4.466,-73.391 5.982,-73.391 7.498,-73.391 9.014,-73.391 10.53,-73.391 12.046,-73.391 13.562,-73.391 15.078,-73.391 16.594,-73.391 18.11,-73.391 19.626,-73.391 21.142,-73.391 27.206,-73.391 28.722,-73.391 30.238,-73.391 31.754,-73.391 33.27,-73.391 34.786,-73.391 36.302,-73.391 37.818,-73.391 39.334,-73.391 40.85,-73.391 42.366,-73.391 43.882,-73.391 -114.54,-71.875 -113.024,-71.875 -111.508,-71.875 -109.992,-71.875 -103.928,-71.875 -102.412,-71.875 -100.896,-71.875 -99.38,-71.875 -97.864,-71.875 -96.348,-71.875 -94.832,-71.875 -93.316,-71.875 -91.8,-71.875 -90.284,-71.875 -88.768,-71.875 -87.252,-71.875 -85.736,-71.875 -84.22,-71.875 -82.704,-71.875 -81.188,-71.875 -79.672,-71.875 -78.156,-71.875 -76.64,-71.875 -75.124,-71.875 -73.608,-71.875 -72.092,-71.875 -70.576,-71.875 -69.06,-71.875 -67.544,-71.875 -59.964,-71.875 -58.448,-71.875 -56.932,-71.875 -26.612,-71.875 -25.096,-71.875 -23.58,-71.875 -16,-71.875 -14.484,-71.875 -12.968,-71.875 -11.452,-71.875 -9.936,-71.875 -8.42,-71.875 -6.904,-71.875 -5.388,-71.875 -3.872,-71.875 -2.356,-71.875 -0.84,-71.875 0.676,-71.875 2.192,-71.875 3.708,-71.875 5.224,-71.875 6.74,-71.875 8.256,-71.875 9.772,-71.875 11.288,-71.875 12.804,-71.875 14.32,-71.875 15.836,-71.875 17.352,-71.875 18.868,-71.875 20.384,-71.875 21.9,-71.875 27.964,-71.875 29.48,-71.875 30.996,-71.875 32.512,-71.875 34.028,-71.875 35.544,-71.875 37.06,-71.875 38.576,-71.875 40.092,-71.875 41.608,-71.875 43.124,-71.875 -113.782,-70.359 -112.266,-70.359 -110.75,-70.359 -109.234,-70.359 -104.686,-70.359 -103.17,-70.359 -101.654,-70.359 -100.138,-70.359 -98.622,-70.359 -97.106,-70.359 -95.59,-70.359 -94.074,-70.359 -92.558,-70.359 -91.042,-70.359 -89.526,-70.359 -88.01,-70.359 -86.494,-70.359 -84.978,-70.359 -83.462,-70.359 -81.946,-70.359 -80.43,-70.359 -78.914,-70.359 -77.398,-70.359 -75.882,-70.359 -74.366,-70.359 -72.85,-70.359 -71.334,-70.359 -69.818,-70.359 -68.302,-70.359 -66.786,-70.359 -60.722,-70.359 -59.206,-70.359 -57.69,-70.359 -27.37,-70.359 -25.854,-70.359 -24.338,-70.359 -22.822,-70.359 -16.758,-70.359 -15.242,-70.359 -13.726,-70.359 -12.21,-70.359 -10.694,-70.359 -9.178,-70.359 -7.662,-70.359 -6.146,-70.359 -4.63,-70.359 -3.114,-70.359 -1.598,-70.359 -0.082,-70.359 1.434,-70.359 2.95,-70.359 4.466,-70.359 5.982,-70.359 7.498,-70.359 9.014,-70.359 10.53,-70.359 12.046,-70.359 13.562,-70.359 15.078,-70.359 16.594,-70.359 18.11,-70.359 19.626,-70.359 21.142,-70.359 27.206,-70.359 28.722,-70.359 30.238,-70.359 31.754,-70.359 33.27,-70.359 34.786,-70.359 36.302,-70.359 37.818,-70.359 39.334,-70.359 40.85,-70.359 42.366,-70.359 43.882,-70.359 -79.672,-68.843 -78.156,-68.843 -76.64,-68.843 -75.124,-68.843 -73.608,-68.843 -72.092,-68.843 -70.576,-68.843 -69.06,-68.843 -67.544,-68.843 -66.028,-68.843 -64.512,-68.843 -62.996,-68.843 -61.48,-68.843 -59.964,-68.843 -58.448,-68.843 -56.932,-68.843 -26.612,-68.843 -25.096,-68.843 -23.58,-68.843 -22.064,-68.843 -20.548,-68.843 -19.032,-68.843 -17.516,-68.843 -16,-68.843 -14.484,-68.843 -12.968,-68.843 -11.452,-68.843 -9.936,-68.843 -8.42,-68.843 -6.904,-68.843 -5.388,-68.843 -3.872,-68.843 -2.356,-68.843 -0.84,-68.843 0.676,-68.843 2.192,-68.843 3.708,-68.843 5.224,-68.843 6.74,-68.843 8.256,-68.843 9.772,-68.843 11.288,-68.843 12.804,-68.843 14.32,-68.843 15.836,-68.843 17.352,-68.843 18.868,-68.843 20.384,-68.843 21.9,-68.843 23.416,-68.843 24.932,-68.843 26.448,-68.843 27.964,-68.843 29.48,-68.843 30.996,-68.843 32.512,-68.843 34.028,-68.843 35.544,-68.843 37.06,-68.843 38.576,-68.843 40.092,-68.843 41.608,-68.843 43.124,-68.843 -77.398,-67.327 -75.882,-67.327 -74.366,-67.327 -72.85,-67.327 -71.334,-67.327 -69.818,-67.327 -68.302,-67.327 -66.786,-67.327 -65.27,-67.327 -63.754,-67.327 -62.238,-67.327 -60.722,-67.327 -59.206,-67.327 -57.69,-67.327 -27.37,-67.327 -25.854,-67.327 -24.338,-67.327 -22.822,-67.327 -21.306,-67.327 -19.79,-67.327 -18.274,-67.327 -16.758,-67.327 -15.242,-67.327 -13.726,-67.327 -12.21,-67.327 -10.694,-67.327 -9.178,-67.327 -7.662,-67.327 -6.146,-67.327 -4.63,-67.327 -3.114,-67.327 -1.598,-67.327 -0.082,-67.327 1.434,-67.327 2.95,-67.327 4.466,-67.327 5.982,-67.327 7.498,-67.327 9.014,-67.327 10.53,-67.327 12.046,-67.327 13.562,-67.327 15.078,-67.327 16.594,-67.327 18.11,-67.327 19.626,-67.327 21.142,-67.327 22.658,-67.327 24.174,-67.327 25.69,-67.327 27.206,-67.327 28.722,-67.327 30.238,-67.327 31.754,-67.327 33.27,-67.327 34.786,-67.327 36.302,-67.327 37.818,-67.327 39.334,-67.327 40.85,-67.327 42.366,-67.327 43.882,-67.327 -76.64,-65.811 -75.124,-65.811 -73.608,-65.811 -72.092,-65.811 -70.576,-65.811 -69.06,-65.811 -67.544,-65.811 -66.028,-65.811 -61.48,-65.811 -59.964,-65.811 -58.448,-65.811 -56.932,-65.811 -26.612,-65.811 -25.096,-65.811 -23.58,-65.811 -22.064,-65.811 -17.516,-65.811 -16,-65.811 -14.484,-65.811 -12.968,-65.811 -11.452,-65.811 -9.936,-65.811 -8.42,-65.811 -6.904,-65.811 -5.388,-65.811 -3.872,-65.811 -2.356,-65.811 -0.84,-65.811 0.676,-65.811 2.192,-65.811 3.708,-65.811 5.224,-65.811 6.74,-65.811 8.256,-65.811 9.772,-65.811 11.288,-65.811 12.804,-65.811 14.32,-65.811 15.836,-65.811 17.352,-65.811 18.868,-65.811 20.384,-65.811 21.9,-65.811 27.964,-65.811 29.48,-65.811 30.996,-65.811 32.512,-65.811 34.028,-65.811 35.544,-65.811 37.06,-65.811 38.576,-65.811 40.092,-65.811 41.608,-65.811 43.124,-65.811 -77.398,-64.295 -75.882,-64.295 -74.366,-64.295 -72.85,-64.295 -71.334,-64.295 -69.818,-64.295 -68.302,-64.295 -66.786,-64.295 -60.722,-64.295 -59.206,-64.295 -57.69,-64.295 -27.37,-64.295 -25.854,-64.295 -24.338,-64.295 -22.822,-64.295 -16.758,-64.295 -15.242,-64.295 -13.726,-64.295 -12.21,-64.295 -10.694,-64.295 -9.178,-64.295 -7.662,-64.295 -6.146,-64.295 -4.63,-64.295 -3.114,-64.295 -1.598,-64.295 -0.082,-64.295 1.434,-64.295 2.95,-64.295 4.466,-64.295 5.982,-64.295 7.498,-64.295 9.014,-64.295 10.53,-64.295 12.046,-64.295 13.562,-64.295 15.078,-64.295 16.594,-64.295 18.11,-64.295 19.626,-64.295 21.142,-64.295 27.206,-64.295 28.722,-64.295 30.238,-64.295 31.754,-64.295 33.27,-64.295 34.786,-64.295 36.302,-64.295 37.818,-64.295 39.334,-64.295 40.85,-64.295 42.366,-64.295 43.882,-64.295 -75.124,-62.779 -73.608,-62.779 -72.092,-62.779 -70.576,-62.779 -69.06,-62.779 -67.544,-62.779 -66.028,-62.779 -61.48,-62.779 -59.964,-62.779 -26.612,-62.779 -25.096,-62.779 -23.58,-62.779 -22.064,-62.779 -17.516,-62.779 -16,-62.779 -14.484,-62.779 -12.968,-62.779 -11.452,-62.779 -9.936,-62.779 -8.42,-62.779 -6.904,-62.779 -5.388,-62.779 -3.872,-62.779 -2.356,-62.779 -0.84,-62.779 0.676,-62.779 2.192,-62.779 3.708,-62.779 5.224,-62.779 6.74,-62.779 8.256,-62.779 9.772,-62.779 11.288,-62.779 12.804,-62.779 14.32,-62.779 15.836,-62.779 17.352,-62.779 18.868,-62.779 20.384,-62.779 21.9,-62.779 26.448,-62.779 27.964,-62.779 29.48,-62.779 30.996,-62.779 32.512,-62.779 34.028,-62.779 35.544,-62.779 37.06,-62.779 38.576,-62.779 40.092,-62.779 41.608,-62.779 -34.192,-2.14 -32.676,-2.14 -31.16,-2.14 -29.644,-2.14 -28.128,-2.14 -26.612,-2.14 -25.096,-2.14 -23.58,-2.14 -22.064,-2.14 -20.548,-2.14 -19.032,-2.14 -17.516,-2.14 -16,-2.14 -14.484,-2.14 -12.968,-2.14 -11.452,-2.14 -9.936,-2.14 -8.42,-2.14 -6.904,-2.14 -5.388,-2.14 -3.872,-2.14
G: H1.6 Q1.1 Q2.1 R1.2 Z1.K | length 72.2
  Top Layer w1: Q2.1@-45.197,-8.954 Q2.1@-45.197,-8.545 ; Q2.1@-44.475,-7.698 -44.475,-8.198 -44.236,-8.438 -44.236,-10.201 -42.733,-11.703 -19.794,-11.703 -17.634,-13.863 H1.6@-17.634,-13.963 ; R1.2@-20.994,-20.812 R1.2@-20.994,-20.703 R1.2@-20.917,-20.78 ; Q1.1@-12.37,-7.698 -12.903,-8.231 -14.579,-8.231 -17.634,-11.285 H1.6@-17.634,-13.963 ; Z1.K@-0.565,-21.155 Z1.K@-0.414,-21.003 -0.439,-21.003 -2.197,-22.761 -18.936,-22.761 R1.2@-20.917,-20.78 ; R1.2@-20.917,-20.78 -19.343,-20.78 -17.634,-19.071 H1.6@-17.634,-16.503 H1.6@-17.634,-13.963
GNDK: H1.1 P1.1 | length 7.1
  Top Layer w1: P1.1@-34.374,-15.203 -34.124,-14.953 -33.007,-14.953 -32.017,-13.963 H1.1@-30.334,-13.963 H1.1@-30.334,-16.503
IP+in: +Vin1.1 Power1.2 R3.2 R7.2 U3.IP+ | length 96.2
  Top Layer w1: R7.2@-112.434,-96.403 -112.434,-96.717 -111.774,-97.377 R3.2@-111.774,-101.793
  Top Layer w4: Power1.2@-138.886,-66.712 -137.374,-65.2 -137.374,-39.885 +Vin1.1@-137.725,-39.534 ; +Vin1.1@-137.494,-39.303 -136.577,-38.386 -132.686,-38.386 U3.IP+@-127.256,-32.956 U3.IP+@-127.256,-30.356 U3.IP+@-127.256,-27.856
  Bottom Layer w4: Power1.2@-138.886,-66.712 -132.065,-66.712 -123.674,-75.103 -123.674,-85.163 R7.2@-112.434,-96.403
  other v1: -139.554,-64.295 -138.038,-64.295 -136.522,-64.295 -135.006,-64.295 -133.49,-64.295 -131.974,-64.295 -130.458,-64.295 -128.942,-64.295 -127.426,-64.295 -141.828,-62.779 -140.312,-62.779 -138.796,-62.779 -137.28,-62.779 -135.764,-62.779 -134.248,-62.779 -132.732,-62.779 -131.216,-62.779 -129.7,-62.779 -128.184,-62.779 -126.668,-62.779 -141.07,-61.263 -139.554,-61.263 -138.038,-61.263 -136.522,-61.263 -135.006,-61.263 -133.49,-61.263 -131.974,-61.263 -130.458,-61.263 -128.942,-61.263 -127.426,-61.263 -125.91,-61.263 -141.828,-59.747 -140.312,-59.747 -138.796,-59.747 -137.28,-59.747 -135.764,-59.747 -134.248,-59.747 -132.732,-59.747 -131.216,-59.747 -129.7,-59.747 -128.184,-59.747 -126.668,-59.747 -141.07,-58.231 -139.554,-58.231 -138.038,-58.231 -136.522,-58.231 -135.006,-58.231 -133.49,-58.231 -131.974,-58.231 -130.458,-58.231 -128.942,-58.231 -127.426,-58.231 -125.91,-58.231 -141.828,-56.715 -140.312,-56.715 -138.796,-56.715 -137.28,-56.715 -135.764,-56.715 -134.248,-56.715 -132.732,-56.715 -131.216,-56.715 -129.7,-56.715 -128.184,-56.715 -126.668,-56.715 -141.07,-55.199 -139.554,-55.199 -138.038,-55.199 -136.522,-55.199 -135.006,-55.199 -133.49,-55.199 -131.974,-55.199 -130.458,-55.199 -128.942,-55.199 -127.426,-55.199 -125.91,-55.199 -141.828,-53.683 -140.312,-53.683 -138.796,-53.683 -137.28,-53.683 -135.764,-53.683 -134.248,-53.683 -132.732,-53.683 -131.216,-53.683 -129.7,-53.683 -128.184,-53.683 -126.668,-53.683 -141.07,-52.167 -139.554,-52.167 -138.038,-52.167 -136.522,-52.167 -135.006,-52.167 -133.49,-52.167 -131.974,-52.167 -130.458,-52.167 -128.942,-52.167 -127.426,-52.167 -125.91,-52.167 -141.828,-50.651 -140.312,-50.651 -138.796,-50.651 -137.28,-50.651 -135.764,-50.651 -134.248,-50.651 -132.732,-50.651 -131.216,-50.651 -129.7,-50.651 -128.184,-50.651 -126.668,-50.651 -141.07,-49.135 -139.554,-49.135 -138.038,-49.135 -136.522,-49.135 -135.006,-49.135 -133.49,-49.135 -131.974,-49.135 -130.458,-49.135 -128.942,-49.135 -127.426,-49.135 -125.91,-49.135 -141.828,-47.619 -140.312,-47.619 -138.796,-47.619 -137.28,-47.619 -135.764,-47.619 -134.248,-47.619 -132.732,-47.619 -131.216,-47.619 -129.7,-47.619 -128.184,-47.619 -126.668,-47.619 -141.07,-46.103 -139.554,-46.103 -138.038,-46.103 -136.522,-46.103 -135.006,-46.103 -133.49,-46.103 -131.974,-46.103 -130.458,-46.103 -128.942,-46.103 -127.426,-46.103 -125.91,-46.103 -141.828,-44.587 -140.312,-44.587 -134.248,-44.587 -132.732,-44.587 -131.216,-44.587 -129.7,-44.587 -128.184,-44.587 -126.668,-44.587 -133.49,-43.071 -131.974,-43.071 -130.458,-43.071 -128.942,-43.071 -127.426,-43.071 -125.91,-43.071 -131.216,-41.555 -129.7,-41.555 -128.184,-41.555 -126.668,-41.555 -131.974,-40.039 -130.458,-40.039 -128.942,-40.039 -127.426,-40.039 -125.91,-40.039 -131.216,-38.523 -129.7,-38.523 -128.184,-38.523 -126.668,-38.523 -131.974,-37.008 -130.458,-37.008 -128.942,-37.008 -127.426,-37.008 -125.91,-37.008 -141.828,-35.492 -132.732,-35.492 -131.216,-35.492 -129.7,-35.492 -128.184,-35.492 -126.668,-35.492 -141.07,-33.976 -139.554,-33.976 -138.038,-33.976 -136.522,-33.976 -135.006,-33.976 -133.49,-33.976 -131.974,-33.976 -130.458,-33.976 -128.942,-33.976 -141.828,-32.46 -140.312,-32.46 -138.796,-32.46 -137.28,-32.46 -135.764,-32.46 -134.248,-32.46 -132.732,-32.46 -131.216,-32.46 -129.7,-32.46 -141.07,-30.944 -139.554,-30.944 -138.038,-30.944 -136.522,-30.944 -135.006,-30.944 -133.49,-30.944 -131.974,-30.944 -130.458,-30.944 -128.942,-30.944 -141.828,-29.428 -140.312,-29.428 -138.796,-29.428 -137.28,-29.428 -135.764,-29.428 -134.248,-29.428 -132.732,-29.428 -131.216,-29.428 -129.7,-29.428 -141.07,-27.912 -139.554,-27.912 -138.038,-27.912 -136.522,-27.912 -135.006,-27.912 -133.49,-27.912 -131.974,-27.912 -130.458,-27.912 -140.312,-26.396 -138.796,-26.396 -137.28,-26.396 -135.764,-26.396 -134.248,-26.396 -132.732,-26.396 -131.216,-26.396 -129.7,-26.396 -128.184,-26.396 -126.668,-26.396
IP-in: relay_1.COM U3.IP- | length 61.1
  Top Layer w4: U3.IP-@-114.356,-32.956 U3.IP-@-114.356,-30.356 U3.IP-@-114.356,-27.856
  Bottom Layer w4: U3.IP-@-114.356,-27.856 U3.IP-@-114.356,-30.356 U3.IP-@-114.356,-32.956 -114.356,-33.785 -112.013,-36.129 -93.099,-36.129 -80.592,-23.622 -80.592,-13.573 relay_1.COM@-80.516,-13.496
IP-out: +VE_OUT1.1 Power2.1 R2.2 R8.2 R12.2 U4.IP- | length 313.2
  Top Layer w4: U4.IP-@16.426,-24.003 U4.IP-@18.926,-24.003 U4.IP-@21.526,-24.003 32.726,-35.203 32.726,-44.46 35.069,-46.803 59.669,-46.803 60.864,-47.999 60.864,-51.355 +VE_OUT1.1@62.012,-52.503
  Bottom Layer w1: 61.708,-79.193 62.012,-78.889
  Bottom Layer w1.5: R8.2@-89.024,-113.413 -89.024,-110.739 -88.288,-110.003 -82.652,-110.003 -81.774,-110.882 -81.774,-112.603 ; R2.2@56.326,-76.463 56.326,-69.203 57.326,-68.203
  Bottom Layer w4: -81.774,-112.603 -81.774,-119.703 -78.374,-123.103 37.026,-123.103 50.526,-109.603 R12.2@50.526,-101.503 50.526,-70.547 52.869,-68.203 57.326,-68.203 62.012,-68.203 ; +VE_OUT1.1@62.012,-52.503 62.012,-68.203 ; Power2.1@63.926,-80.803 62.012,-78.889 62.012,-68.203
  other v1: 52.978,-79.455 54.494,-79.455 56.01,-79.455 57.526,-79.455 59.042,-79.455 60.558,-79.455 62.074,-79.455 50.704,-77.939 52.22,-77.939 53.736,-77.939 55.252,-77.939 56.768,-77.939 58.284,-77.939 59.8,-77.939 61.316,-77.939 62.832,-77.939 64.348,-77.939 65.864,-77.939 49.946,-76.423 51.462,-76.423 52.978,-76.423 54.494,-76.423 59.042,-76.423 60.558,-76.423 62.074,-76.423 63.59,-76.423 65.106,-76.423 66.622,-76.423 50.704,-74.907 52.22,-74.907 53.736,-74.907 55.252,-74.907 56.768,-74.907 58.284,-74.907 59.8,-74.907 61.316,-74.907 62.832,-74.907 64.348,-74.907 65.864,-74.907 49.946,-73.391 51.462,-73.391 52.978,-73.391 54.494,-73.391 56.01,-73.391 57.526,-73.391 59.042,-73.391 60.558,-73.391 62.074,-73.391 63.59,-73.391 65.106,-73.391 66.622,-73.391 50.704,-71.875 52.22,-71.875 53.736,-71.875 55.252,-71.875 56.768,-71.875 58.284,-71.875 59.8,-71.875 61.316,-71.875 62.832,-71.875 64.348,-71.875 65.864,-71.875 49.946,-70.359 51.462,-70.359 52.978,-70.359 54.494,-70.359 56.01,-70.359 57.526,-70.359 59.042,-70.359 60.558,-70.359 62.074,-70.359 63.59,-70.359 65.106,-70.359 66.622,-70.359 50.704,-68.843 52.22,-68.843 53.736,-68.843 55.252,-68.843 56.768,-68.843 58.284,-68.843 59.8,-68.843 61.316,-68.843 62.832,-68.843 64.348,-68.843 65.864,-68.843 49.946,-67.327 51.462,-67.327 52.978,-67.327 54.494,-67.327 56.01,-67.327 57.526,-67.327 59.042,-67.327 60.558,-67.327 62.074,-67.327 63.59,-67.327 65.106,-67.327 66.622,-67.327 50.704,-65.811 52.22,-65.811 53.736,-65.811 55.252,-65.811 56.768,-65.811 58.284,-65.811 59.8,-65.811 61.316,-65.811 62.832,-65.811 64.348,-65.811 65.864,-65.811 49.946,-64.295 51.462,-64.295 52.978,-64.295 54.494,-64.295 56.01,-64.295 57.526,-64.295 59.042,-64.295 60.558,-64.295 62.074,-64.295 63.59,-64.295 65.106,-64.295 66.622,-64.295 50.704,-62.779 52.22,-62.779 53.736,-62.779 55.252,-62.779 56.768,-62.779 58.284,-62.779 59.8,-62.779 61.316,-62.779 62.832,-62.779 64.348,-62.779 65.864,-62.779 56.01,-61.263 57.526,-61.263 59.042,-61.263 60.558,-61.263 62.074,-61.263 63.59,-61.263 65.106,-61.263 66.622,-61.263 56.768,-59.747 58.284,-59.747 59.8,-59.747 61.316,-59.747 62.832,-59.747 64.348,-59.747 65.864,-59.747 57.526,-58.231 59.042,-58.231 60.558,-58.231 62.074,-58.231 63.59,-58.231 65.106,-58.231 66.622,-58.231 58.284,-56.715 65.864,-56.715 57.526,-49.135 66.622,-49.135 58.284,-47.619 65.864,-47.619 57.526,-46.103 59.042,-46.103 60.558,-46.103 62.074,-46.103 63.59,-46.103 65.106,-46.103 66.622,-46.103 59.8,-44.587 61.316,-44.587 62.832,-44.587 64.348,-44.587
  other v2: 50.526,-79.803
NetC1_1: C1.1 L1.1 relay_1.NO | length 73
  Top Layer w4: C1.1@-107.136,-62.648 C1.1@-107.136,-57.408 -107.097,-57.37 -104.049,-57.37 relay_1.NO@-77.975,-31.296
  Bottom Layer w4: relay_1.NO@-77.975,-31.296 -71.382,-24.703 -62.46,-24.703 -60.117,-27.047 -60.117,-28.534 -57.895,-30.757 L1.1@-57.895,-32.38
NetC8_1: C8.1 R4.1 R5.2 U5.3 | length 29.4
  Top Layer w1: R5.2@-111.774,-122.393 R4.1@-111.774,-119.813 -111.697,-119.737 -111.697,-119.127 -106.218,-113.647 -103.158,-113.647 -102.776,-113.266 -101.936,-113.266 -100.574,-111.903 C8.1@-100.574,-99.913
NetC9_1: C9.1 R9.1 R10.2 U5.12 | length 27.5
  Top Layer w1: U5.12@-95.354,-113.463 -95.329,-113.438 R9.1@-91.899,-113.438 ; R10.2@-91.974,-116.693 -91.924,-116.643 -91.924,-113.463 R9.1@-91.899,-113.438 ; R9.1@-91.874,-113.413 R9.1@-91.899,-113.438
  Bottom Layer w1: U5.12@-95.354,-113.463 -97.788,-113.463 -98.374,-112.878 -98.374,-105.503 -92.674,-99.803 C9.1@-90.674,-99.803
NetD2_A: D2.A Relay1.1 relay_1.- | length 18.7
  Top Layer w1: Relay1.1@-104.894,-8.303 -102.647,-10.55 D2.A@-102.647,-16.441 -94.772,-16.441 -93.917,-17.296 relay_1.-@-93.376,-17.296
NetD2_C: D2.C Relay1.2 relay_1.+ | length 31.2
  Top Layer w1: Relay1.2@-109.974,-8.303 -109.974,-19.714 D2.C@-102.647,-27.041 -102.419,-27.269 -93.603,-27.269 relay_1.+@-93.376,-27.496
NetR3_1: R3.1 R4.2 | length 2.8
  Top Layer w1: R4.2@-111.774,-112.193 R3.1@-111.774,-109.413
NetR5_1: R5.1 R6.2 | length 8.9
  Top Layer w1: R5.1@-111.774,-130.013 -111.774,-126.703 -111.374,-126.304 -111.374,-126.004 -108.824,-123.454 -108.824,-122.444 R6.2@-108.774,-122.393
NetR7_1: R7.1 U1.+ | length 16.3
  Top Layer w4: U1.+@-139.974,-106.003 -137.274,-106.003 R7.1@-127.674,-96.403
NetR8_1: R8.1 R9.2 | length 2.8
  Top Layer w1: R9.2@-91.874,-105.793 R8.1@-89.024,-105.793
NetR10_1: R10.1 R11.2 | length 3.1
  Top Layer w1: R10.1@-91.974,-124.313 -91.924,-124.363 -88.924,-124.363 R11.2@-88.874,-124.413
NetR12_1: R12.1 U2.+ | length 24.1
  Bottom Layer w4: U2.+@39.426,-35.703 50.526,-46.803 R12.1@50.526,-55.203
NetR13_2: R13.2 U5.1 U5.2 | length 8.9
  Top Layer w1: R13.2@-108.774,-112.193 -107.504,-110.923 U5.2@-102.974,-110.923 U5.1@-102.974,-108.383
NetR14_2: R14.2 U5.13 U5.14 | length 12.8
  Top Layer w1: U5.13@-95.354,-110.923 U5.14@-95.354,-108.383 -88.764,-108.383 R14.2@-86.174,-105.793
PWM_G: H1.3 P1.2 | length 20.6
  Top Layer w1: P1.2@-36.914,-15.203 -36.914,-17.763 -34.474,-20.203 -26.774,-20.203 -25.254,-18.683 H1.3@-25.254,-16.503 H1.3@-25.254,-13.963
uGND: H6.3 P4.2 | length 13.1
  Bottom Layer w1: H6.3@-100.514,-129.403 -100.514,-131.818 -99.928,-132.403 -94.274,-132.403 P4.2@-91.274,-129.403
uGND_1: H2.2 U1.uGND | length 21
  Top Layer w1: H2.2@-123.874,-129.4 -123.874,-117.443 U1.uGND@-117.474,-111.043
uGND_2: H4.3 U3.GND | length 5.9
  Top Layer w1: H4.3@-122.738,-14.795 -122.738,-15.075 -121.756,-16.057 U3.GND@-121.756,-20.256
uGND_3: H3.2 U2.uGND | length 6.3
  Top Layer w1: H3.2@44.266,-7.003 44.366,-7.103 44.366,-13.103 U2.uGND@44.466,-13.203
uGND_4: H5.3 U4.GND | length 6.9
  Top Layer w1: H5.3@2.026,-31.643 8.478,-31.643 8.718,-31.403 U4.GND@8.826,-31.403
Vcc: H6.4 U5.4 | length 16.1
  Bottom Layer w1: H6.4@-103.054,-129.403 -100.774,-127.123 -100.774,-116.789 -101.362,-116.201 -102.776,-116.201 U5.4@-102.974,-116.003
Vcc_1: H2.1 U1.Vcc | length 27.1
  Top Layer w1: H2.1@-126.414,-129.4 -126.414,-114.943 U1.Vcc@-117.474,-106.003
Vcc_2: H4.4 U3.VCC | length 6.1
  Top Layer w1: H4.4@-125.278,-14.795 -125.278,-18.634 U3.VCC@-123.656,-20.256
Vcc_3: H3.1 U2.Vcc | length 7.2
  Top Layer w1: U2.Vcc@39.426,-13.203 39.426,-9.303 H3.1@41.726,-7.003
Vcc_4: H5.4 U4.VCC | length 7.3
  Top Layer w1: H5.4@2.026,-34.183 2.224,-34.381 2.954,-34.381 2.976,-34.403 7.726,-34.403 U4.VCC@8.826,-33.303
Vin_Sens1: H6.1 R13.1 | length 21.1
  Top Layer w1: R13.1@-108.774,-119.813 -108.697,-119.89 -106.659,-119.89 -106.074,-120.476 -106.074,-125.518 -105.488,-126.103 -97.274,-126.103 -95.78,-127.597 -95.78,-129.057 H6.1@-95.434,-129.403
Vin_Sens2: H2.3 U1.Vo | length 14.9
  Top Layer w1: H2.3@-121.334,-129.4 -121.334,-119.983 U1.Vo@-117.474,-116.123
Vout_Sens1: P3.1 R14.1 | length 17.5
  Bottom Layer w1: R14.1@-86.174,-113.413 -86.174,-124.903 -82.884,-128.193 -82.884,-129.15 P3.1@-82.634,-129.4
Vout_Sens2: H3.3 U2.Vo | length 7.3
  Top Layer w1: H3.3@46.806,-7.003 46.806,-10.463 U2.Vo@49.546,-13.203
VR_C_in: H4.1 U3.VR | length 5.6
  Top Layer w1: U3.VR@-117.956,-20.256 -117.879,-20.18 -117.879,-15.017 H4.1@-117.658,-14.795
VR_C_out: H5.1 U4.VR | length 7.5
  Top Layer w1: H5.1@2.026,-26.563 2.386,-26.203 7.426,-26.203 U4.VR@8.826,-27.603
VR_in: H2.4 U1.VR | length 8.8
  Top Layer w1: H2.4@-118.794,-129.503 -118.794,-122.523 U1.VR@-117.474,-121.203
VR_out: H3.4 U2.VR | length 8.4
  Top Layer w1: H3.4@49.346,-7.003 49.544,-7.201 49.544,-8.121 U2.VR@54.626,-13.203
pads on no net: H1.2 H1.4 H1.5 H1.7 relay_1.NC U5.5 U5.6 U5.7 U5.8 U5.9 U5.10

## Polygon pours and split planes (outlines as drawn)
Collector on Top Layer "Top Layer-Collector" (solid, remove dead copper, pour order 55): -41.274,-34.303 -38.274,-37.303 -36.174,-37.303 -36.174,-26.203 -30.774,-26.203 -30.774,-38.203 -9.774,-38.203 -6.774,-35.203 -6.774,-27.19 -9.764,-24.2 cw(c-9.739,-24.176) -9.774,-24.176 -25.178,-24.103 -38.274,-24.103 -38.274,-24.021 -47.828,-14.467 -47.828,-3.962 -42.133,-3.962 -42.133,-0.96 -50.384,-0.96 -51.384,-1.96 -51.384,-16.993 -41.274,-27.103
Emitter on Top Layer "EMITTER_L01_P046" (solid, remove dead copper, pour order 46): -34.052,-0.611 -35.077,-1.611 -35.052,-1.611 -35.052,-4.192 -1.127,-4.192 -1.126,-4.193 0.051,-4.193 -2.961,-0.611
IP-out on Top Layer "Top Layer-IP-out" (solid, remove dead copper, pour order 13): 48.526,-79.303 50.426,-81.203 64.726,-81.203 67.726,-78.203 67.726,-45.903 64.726,-42.903 38.326,-42.903 35.326,-39.903 35.326,-25.003 32.326,-22.003 14.526,-22.003 12.626,-23.853 12.626,-25.703 14.626,-27.703 22.426,-27.703 30.726,-36.003 30.726,-56.089 33.726,-59.103 46.626,-59.103 48.526,-61.003